# Altium PCB LCDwen.PcbDoc
Units mil, origin at the board's own origin, x right, y up, seen from the top; angles counter-clockwise.
Board outline 6000 x 4000 mil, 2 copper layers (Top Layer, Bottom Layer); 25 components, 29 nets, 136 pads, 0 vias.
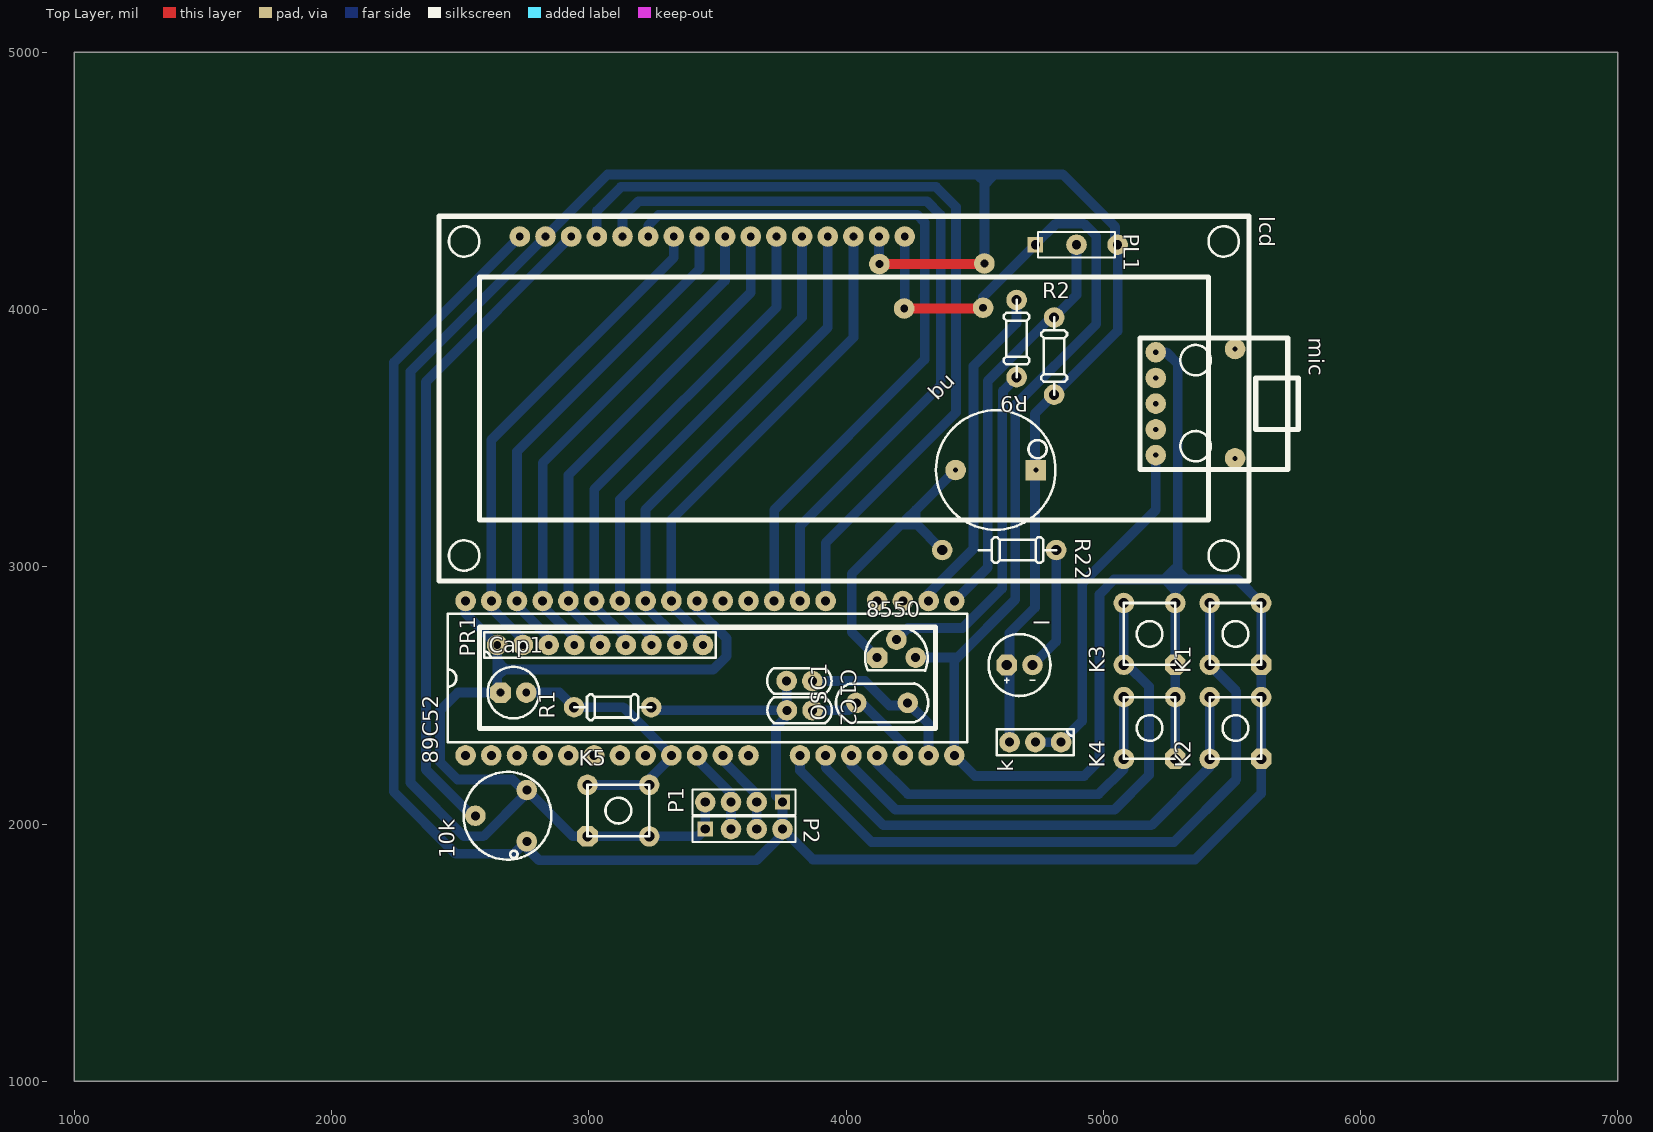
[diagram p0: Top Layer view]
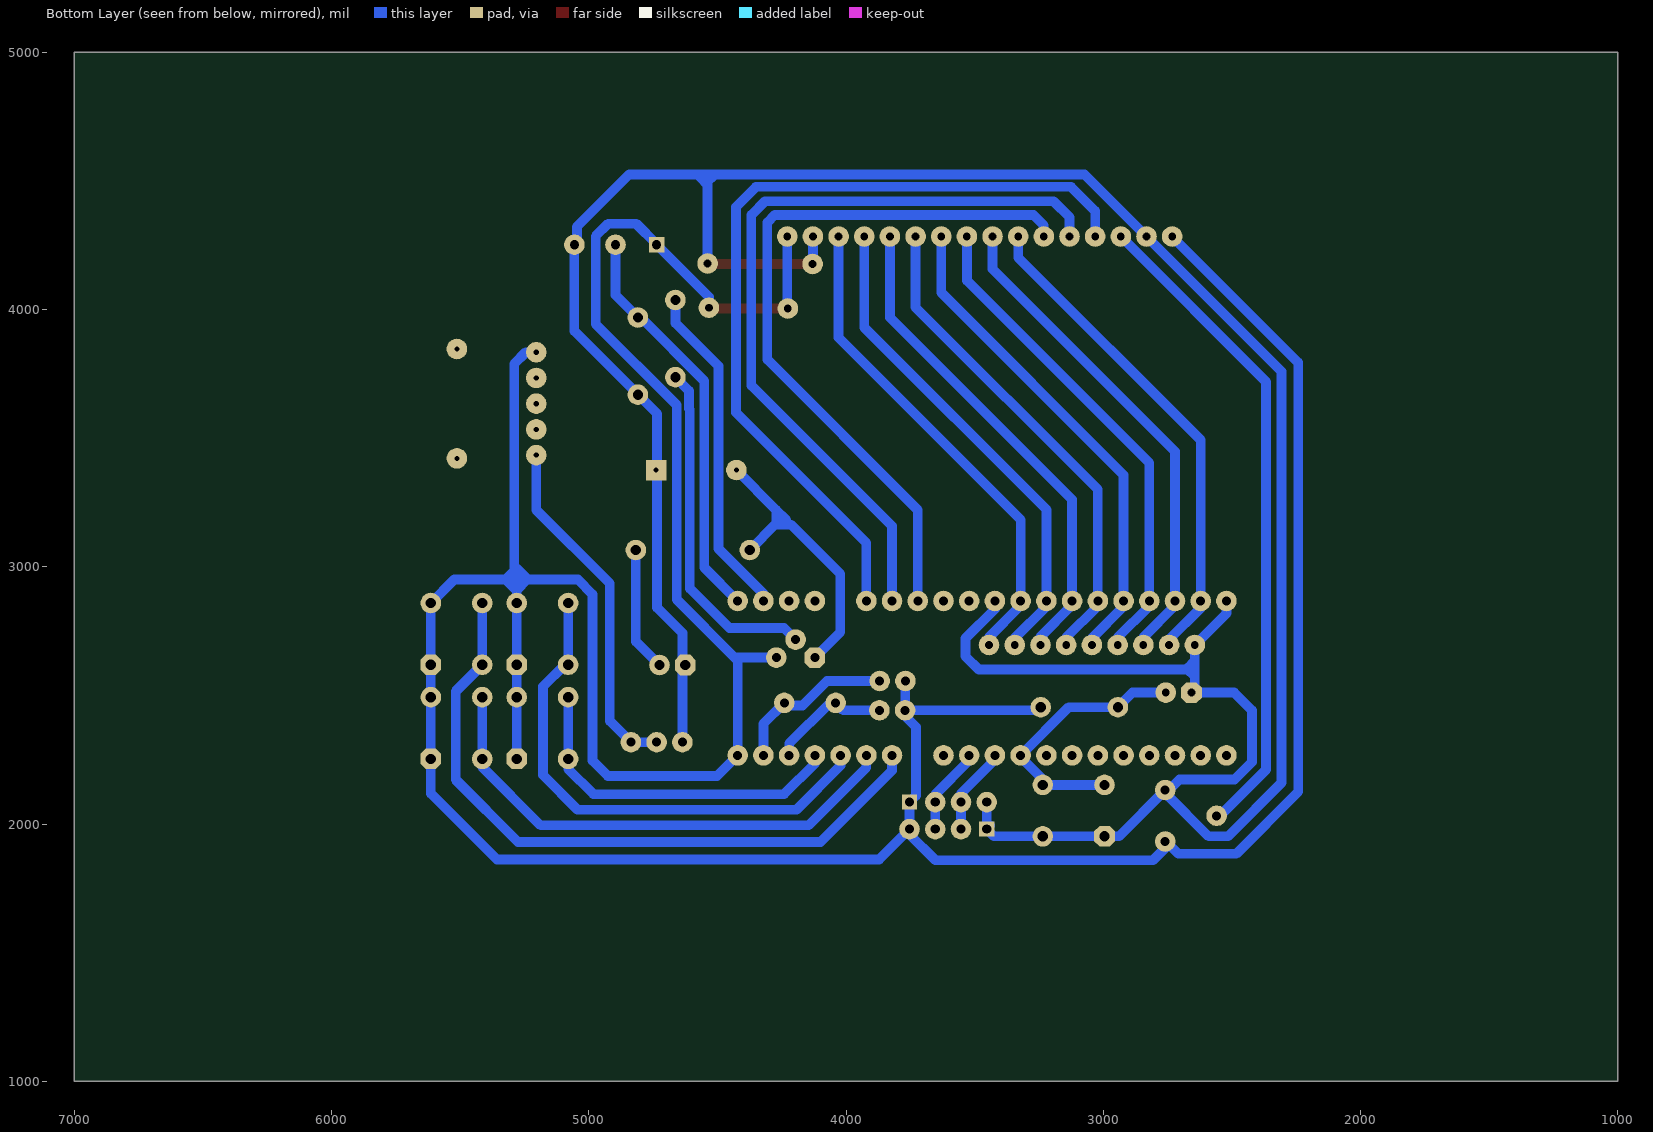
[diagram p1: Bottom Layer view, seen from below]

## Layer stack, top to bottom
Top Layer: signal copper 1.4
Dielectric: dielectric 12.6, FR-4, Dk 4.8
Bottom Layer: signal copper 1.4

## Board outline
1000,1000 7000,1000 7000,5000 1000,5000

## Design rules (kind name [scope] priority, off if disabled: settings)
Clearance [All] p1: gap=10
PolygonConnect [All] p1: connectstyle=Relief reliefconductorwidth=10 reliefentries=4 polygonreliefangle="90 Angle"
RoutingVias [All] p1: holewidth=28 width=50 viastyle="Through Hole" minholewidth=28 minwidth=50 maxholewidth=28 maxwidth=50
SilkscreenOverComponentPads [All] p1: minsilkscreentomaskgap=10
SolderMaskExpansion [All] p1: expansion=4
Width [All] p1: maxlimit=38 minlimit=38 preferedwidth=38 minimp=50.000000 maximp=50.000000 favimp=50.000000
27 further rules are at their usual default settings.

## Components (designator, comment, footprint, x,y, rotation, side; value= is the part's Value field where it differs from the comment)
10k "" 蓝白电位器 2759,2032 r90 top
89C52 "STC89C52" AT89C52 3466,2553 r90 top
8550 "PNP" 三极管PNP 4221,2797 r0 top
bu "buzzer" buzzer 4582,3376 r0 top
C1 "30p" 电容。 3819,2556 r0 top
C2 "30p" 电容。 3820,2442 r0 top
Cap1 "10u" 电容 2657,2511 r0 top
k "*" 拨动开关 4736,2318 r180 top
K1 "开关" 开关 5614,2619 r90 top
K2 "开关" 开关 5614,2253 r90 top
K3 "开关" 开关 5280,2619 r90 top
K4 "开关" 开关 5280,2253 r90 top
K5 "" 开关 2995,1952 r0 top
l "LED大" LED大 4675,2613 r0 top
lcd "lcd1602" lcd1602 3992,3654 r0 top
mic "micro" MICRO 5418,3634 r270 top
OSC1 "11.0952" 晶震 4140,2471 r180 top
P1 "Header 4" HDR1X4 3753,2085 r180 top
P2 "Header 4" HDR1X4 3453,1980 r0 top
PL1 "Header 3" HDR1X3 4796,4252 r0 top
PR1 "103" 排阻 3294,2696 r90 top
R1 "1K" 电阻#1 3243,2454 r180 top
R2 "4.7K" 电阻#1 4809,3669 r90 top
R9 "1k" 电阻#1 4663,4037 r270 top
R22 "500" 电阻#2 4517,3065 r0 top

## Footprints (in the part's own frame and the unit in brackets; to place one, negate y for a bottom-side part, rotate by r counter-clockwise, add the part's x,y. Pads: shape width x height; smd on the part's side, far side on the other; paste and mask are expansions set on the pad)
AT89C52 [mil]
  round 80 hole 35: 1(-286,945) 2(-286,845) 3(-286,745) 4(-286,645) 5(-286,545) 6(-286,445) 7(-286,345) 8(-286,245) 9(-286,145) 10(-286,45) 11(-286,-55) 12(-286,-155) 14(-286,-355) 15(-286,-455) 16(-286,-555) 17(-286,-655) 18(-286,-755) 19(-286,-855) 20(-286,-955) 21(314,-955) 22(314,-855) 23(314,-755) 24(314,-655) 26(314,-455) 27(314,-355) 28(314,-255) 29(314,-155) 30(314,-55) 31(314,45) 32(314,145) 33(314,245) 34(314,345) 35(314,445) 36(314,545) 37(314,645) 38(314,745) 39(314,845) 40(314,945)
  round 80 on Top Paste: 13(-286,-255) 25(314,-555)
  silkscreen extent -236,-1005 264,1015
buzzer [mil]
  rect 80x80 hole 20: 1(156,0)
  round 80 hole 20: 2(-156,0)
  silkscreen extent -232,-232 232,232
HDR1X3 [mil] "Connector; Header; 3 Position"
  rect 59.06x59.06 hole 35.43: 1(-60,0)
  round 80 hole 35.43: 2(100,0) 3(260,0)
  silkscreen extent -50,-50 250,50
HDR1X4 [mil] "Connector; Header; 4 Position"
  rect 59.06x59.06 hole 35.43: 1(0,0)
  round 80 hole 35.43: 2(100,0) 3(200,0) 4(300,0)
  silkscreen extent -50,-50 350,50
lcd1602 [mil]
  round 80 hole 30: 1(-1259.84,629.92) 2(-1160.11,629.92) 3(-1060.37,629.92) 4(-960.63,629.92) 5(-860.89,629.92) 6(-761.16,629.92) 7(-661.42,629.92) 8(-561.68,629.92) 9(-461.94,629.92) 10(-362.2,629.92) 11(-262.47,629.92) 12(-162.73,629.92) 13(-62.99,629.92) 14(36.74,629.92) 15(136.48,629.92) 16(236.22,629.92)
  silkscreen extent -1575,-709 1575,709
LED大 [mil]
  oct 80x80 hole 40: 1(-50,5)
  round 80 hole 40: 2(50,5)
  silkscreen extent -121,-115 120,125
MICRO [mil]
  round 80 hole 20: 1(-200,-213.94) 2(-100,-213.94) 3(0,-213.94) 4(100,-213.94) 5(200,-213.94) 6(-212.6,94.49) 7(212.6,94.49)
  silkscreen extent -256,-275 256,340
三极管PNP [mil]
  oct 80x80 hole 35: 1(-100,-150)
  round 80 hole 35: 2(-25,-80) 3(50,-150)
  silkscreen extent -147,-200 97,-28
开关 [mil]
  oct 80x80 hole 40: 1(0,0)
  round 80 hole 40: 1(240,0) 2(0,200) 2(240,200)
  silkscreen extent 0,0 240,200
拨动开关 [mil]
  round 80 hole 35: 1(-100,0) 2(0,0) 3(100,0)
  silkscreen extent -150,-50 150,50
排阻 [mil]
  round 80 hole 30: 1(0,650) 2(0,550) 3(0,450) 4(0,350) 5(0,250) 6(0,150) 7(0,50) 8(0,-50) 9(0,-150)
  silkscreen extent -50,-200 50,700
晶震 [mil]
  round 80 hole 35: 1(-100,0) 2(100,0)
  silkscreen extent -180,-76 179,76
电容 [mil]
  oct 80x80 hole 30: 1(0,0)
  round 80 hole 30: 2(100,0)
  silkscreen extent -50,-100 150,100
电容。 [mil]
  round 80 hole 35: 1(-50,0) 2(50,0)
  silkscreen extent -126,-50 125,50
电阻#1 [mil]
  round 80 hole 40: 1(0,0) 2(300,0)
  silkscreen extent 0,-50 300,50
电阻#2 [mil]
  round 80 hole 40: 1(-143,0) 2(300,0)
  silkscreen extent 0,-50 300,50
蓝白电位器 [mil]
  round 80 hole 35: 1(-100,0) 2(0,200) 3(100,0)
  silkscreen extent -171,-96 171,246

## Part data
P1 P2: "Header, 4-Pin"
PL1: "Header, 3-Pin"

## Free pads (board coordinates)
  round 80 hole 30: 0(4130,4177) 1(4538,4179) 21(4226,4004) 22(4533,4007)

## Nets (pads, with @x,y where several pads share a name; then routed paths per layer and width w, separated by ;. In a path a pad name is that pad's centre, name@x,y a point inside that pad or via, vN(x,y) a via of type N, cw(c..) or ccw(c..) an arc to the next point about the centre after c; other vN are vias at no path point)
0: 89C52.39 lcd.7 PR1.2 | length 1932.8
  Bottom Layer w38: PR1.2 2744,2717 2621,2840 89C52.39 2621,3493 3330.58,4202.58 lcd.7
1: 89C52.38 lcd.8 PR1.3 | length 1932.7
  Bottom Layer w38: PR1.3 2844,2726 2721,2849 89C52.38 2721,3448 3430.32,4157.32 lcd.8
2: 89C52.37 lcd.9 PR1.4 | length 1932.6
  Bottom Layer w38: PR1.4 2944,2725 2821,2848 89C52.37 2821,3403 3530.06,4112.06 lcd.9
3: 89C52.36 lcd.10 PR1.5 | length 1932.5
  Bottom Layer w38: PR1.5 3044,2722 2921,2845 89C52.36 2921,3357 3629.8,4065.8 lcd.10
4: 89C52.35 lcd.11 PR1.6 | length 1932.4
  Bottom Layer w38: PR1.6 3144,2725 3021,2848 89C52.35 3021,3300 3729.53,4008.53 lcd.11
5: 89C52.34 lcd.12 PR1.7 | length 1932.2
  Bottom Layer w38: PR1.7 3244,2728 3121,2851 89C52.34 3121,3261 3829.27,3969.27 lcd.12
6: 89C52.33 lcd.13 PR1.8 | length 1932.1
  Bottom Layer w38: PR1.8 3344,2723 3221,2846 89C52.33 3221,3222 3929.01,3930.01 lcd.13
7: 89C52.32 lcd.14 PR1.9 | length 1932
  Bottom Layer w38: PR1.9 3444,2726 3321,2849 89C52.32 3321,3183 4028.74,3890.74 lcd.14
25: 89C52.26 lcd.4 | length 3309.2
  Bottom Layer w38: lcd.4 3031.37,4383.37 3125,4477 4350,4477 4428,4399 4428,3600 3921,3093 89C52.26
26: 89C52.27 lcd.5 | length 3087.2
  Bottom Layer w38: lcd.5 3131.11,4359.11 3193,4421 4315,4421 4368,4368 4368,3705 3821,3158 89C52.27
27: 89C52.28 lcd.6 | length 2860.1
  Bottom Layer w38: lcd.6 3230.84,4326.85 3271,4367 4277.12,4367 4306,4338.12 4306,3806 3721,3221 89C52.28
GND: 10k.1 89C52.20 8550.3 C1.1 C2.1 K1.1 K2.1 K3.1 K4.1 lcd.1 lcd.16 mic.1 P1.1 P2.4 pad.21 pad.22 PL1.1 R1.1 | length 15526.1
  Top Layer w38: pad.21 4530,4004 pad.22
  Bottom Layer w38: lcd.1 2242,3793.76 2242,2125 2483,1884 2707,1884 2744,1921 2806,1859 3652,1859 3753,1960 P2.4 ; R1.1 3255,2442 C2.1 ; P2.4@3767,1980 P2.4 ; C1.1 3770,2555 C2.1 ; pad.21 4228.22,4006.22 lcd.16 ; 8550.3 4433,2647 ; pad.22 4533,4049 PL1.1 4736,4254 4815.5,4333.5 4924.5,4333.5 4973,4285 4973,3944 4658,3629 4658,2872 4433,2647 ; mic.1 5245,3834 5290,3789 5290,2984 ; K4.1@5280,2253 5280,2493 5280,2619 5280,2859 5280,2910 ; 5290,2918 5290,2947 ; P2.4 P1.1 3728,2110 3728,2377 3770,2419 C2.1 ; P2.4 3871,1862 5357,1862 5614,2119 5614,2253 5614,2493 5614,2619 5614,2859 5523,2950 5323,2950 ; 4433,2647 4421,2635 89C52.20 4501,2187 4926,2187 4985,2246 4985,2893 5042,2950 5240,2950 ; 5240,2950 5280,2910 ; 5240,2950 5238,2952 5280,2994 5282,2992 ; 5240,2950 5290,2950 ; 5280,2910 5280,2937 5290,2947 ; 5280,2910 5281.5,2908.5 5323,2950 ; 5282,2992 5282,2961 5290,2953 ; 5282,2992 5290,2984 ; 5290,2947 5293,2950 ; 5290,2947 5290,2950 ; 5290,2950 5293,2950 ; 5290,2950 5290,2953 ; 5290,2953 5290,2984 ; 5290,2953 5293,2950 ; 5290,2984 5323.5,2950.5 5323,2950 ; 5293,2950 5323,2950
H: 89C52.16 K3.2 | length 2028
  Bottom Layer w38: 89C52.16 4021,2227 4192.5,2055.5 5043.5,2055.5 5178,2190 5178,2534 K3.2@5093,2619 ; K3.2@5080,2619 K3.2@5080,2859
K: 10k.2 lcd.3 | length 2572.9
  Bottom Layer w38: 10k.2 2546,2032 2367,2211 2367,3719.29 lcd.3
L: 89C52.15 K2.2 | length 1998.8
  Bottom Layer w38: 89C52.15 3921,2219 4145,1995 5187,1995 5414,2222 5414,2253 K2.2@5414,2493
M: 89C52.17 K4.2 | length 1359.3
  Bottom Layer w38: 89C52.17 4121,2236 4241,2116 4982,2116 5080,2214 5080,2253 K4.2@5080,2493
Net89C52_9: 89C52.9 Cap1.2 K5.2 R1.2 | length 1064.8
  Bottom Layer w38: Cap1.2 2886,2511 R1.2 3134,2454 89C52.9 3321,2260 K5.2@3213,2152 ; K5.2@2995,2152 K5.2@3213,2152 ; K5.2@3235,2152 K5.2@3213,2152
Net89C52_18: 89C52.18 C2.2 OSC1.2 | length 474.5
  Bottom Layer w38: C2.2 4011,2442 OSC1.2 4063,2471 4221,2313 89C52.18
Net89C52_19: 89C52.19 C1.2 OSC1.1 | length 652
  Bottom Layer w38: C1.2 4074,2556 4169,2461 4230,2461 OSC1.1 4321,2390 89C52.19
Net8550_1: 8550.1 bu.2 R22.1 | length 1168.4
  Bottom Layer w38: 8550.1 4022,2746 4022,2972 4213.5,3163.5 4267.5,3163.5 4271.5,3167.5 ; 4233,3183 4271.5,3221.5 ; R22.1 4271.5,3167.5 ; bu.2 4271.5,3221.5 ; 4271.5,3167.5 4271.5,3221.5
Net8550_2: 8550.2 R9.2 | length 1337.6
  Bottom Layer w38: 8550.2 4241,2762 4453,2762 4607,2916 4607,3612 4610,3615 4610,3684 R9.2
Netk_1: k.1 k.2 mic.5 | length 1368.5
  Bottom Layer w38: k.2 k.1 4918,2400 4918,2935 5204.06,3221.06 mic.5
Netl_2: l.2 R22.2 | length 485.1
  Bottom Layer w38: l.2 4817,2710 R22.2
P20: 89C52.21 PL1.2 R2.2 | length 1588.5
  Bottom Layer w38: 89C52.21 4551,2997 4551,3722.58 4797.42,3969 R2.2 4896,4056 PL1.2
P21: 89C52.22 R9.1 | length 1311.7
  Bottom Layer w38: 89C52.22 4321,2895 4496,3070 4496,3780 4663,3947 R9.1
R: 89C52.10 P1.3 P2.2 | length 341.7
  Bottom Layer w38: 89C52.10 3421,2250 3553,2118 P1.3 P2.2
T: 89C52.11 P1.2 P2.3 | length 341.7
  Bottom Layer w38: 89C52.11 3521,2246 3653,2114 P1.2 P2.3
U: 89C52.14 K1.2 | length 2700.1
  Bottom Layer w38: 89C52.14 3821,2208 4099,1930 5275,1930 5517,2172 5517,2516 5414,2619 K1.2@5414,2859
VCC: 10k.3 89C52.31 89C52.40 bu.1 Cap1.1 K5.1 k.3 l.1 lcd.2 lcd.15 P1.4 P2.1 pad.0 pad.1 PL1.3 PR1.1 R2.1 | length 11847.4
  Top Layer w38: pad.0 4536,4177 pad.1
  Bottom Layer w38: 89C52.40 2521,2819 PR1.1 2644,2573 ; 2650,2628 2669,2609 ; 89C52.31 3421,2836 3535,2722 3535,2652 3484,2601 2672,2601 2644,2573 ; P2.1@3439,1994 P2.1 ; P1.4 P2.1 ; lcd.15 4128.48,4178.52 pad.0 ; 4516,4519 4538,4497 4538,4485 ; pad.1 4538,4485 ; k.3 4636,2742 4735,2841 4735,3595 R2.1 5056,3916 PL1.3 ; PL1.3@5046,4252 5046,4322 4843,4525 4566,4525 ; 2644,2573 2644,2524 Cap1.1 2491,2511 2422,2442 2422,2241 2490,2173 2703,2173 2744,2132 2744,2121 2746,2119 10k.3 ; 10k.3 2939,1952 2995,1952 3235,1952 3425,1952 P2.1 ; 10k.3 2759,2121 2590,1952 2515.42,1952 2307,2160.42 2307,3759.03 lcd.2 3072.97,4525 4566,4525 ; 4538,4485 4566,4513 4566,4525
pads on no net: 89C52.1 89C52.2 89C52.3 89C52.4 89C52.5 89C52.6 89C52.7 89C52.8 89C52.12 89C52.13 89C52.23 89C52.24 89C52.25 89C52.29 89C52.30 mic.2 mic.3 mic.4 mic.6 mic.7